# Altium PCB WhetherTimeV2.PcbDoc
Units mil, origin at the board's own origin, x right, y up, seen from the top; angles counter-clockwise.
Board outline 965 x 980 mil, 2 copper layers (Top Layer, Bottom Layer); 18 components, 11 nets, 66 pads, 19 vias.
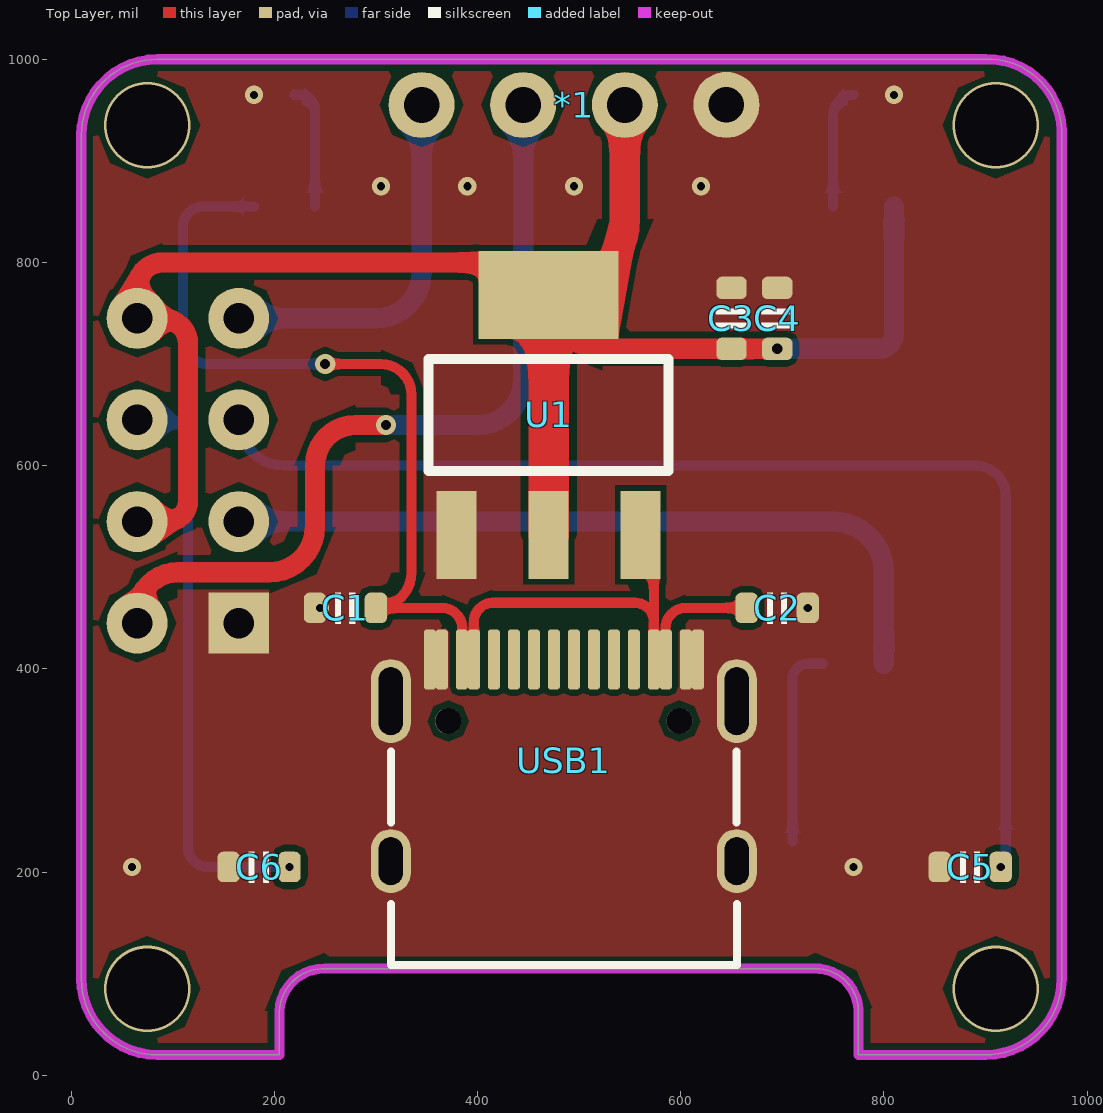
[diagram p0: Top Layer view]
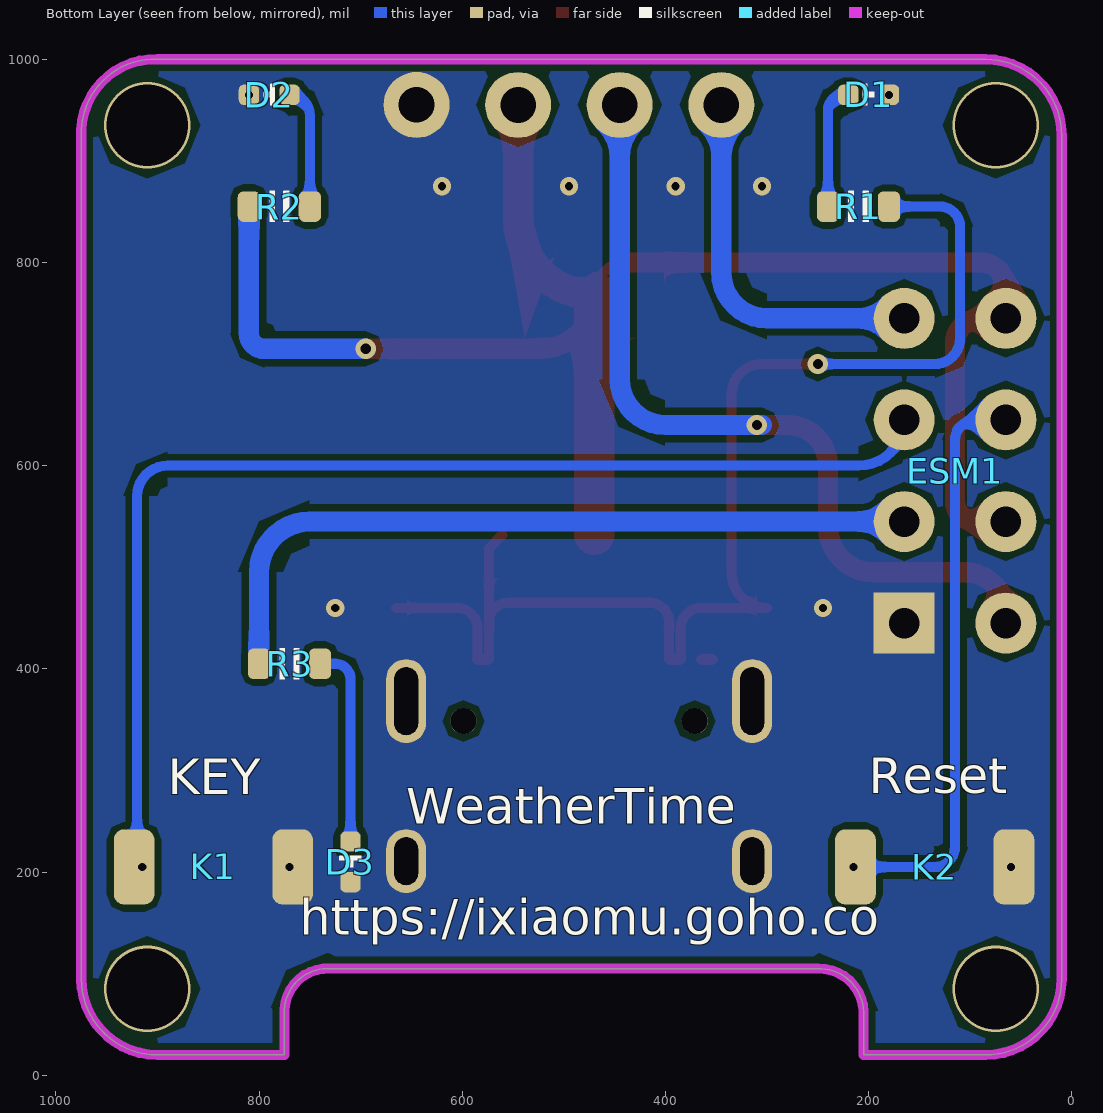
[diagram p1: Bottom Layer view, seen from below]
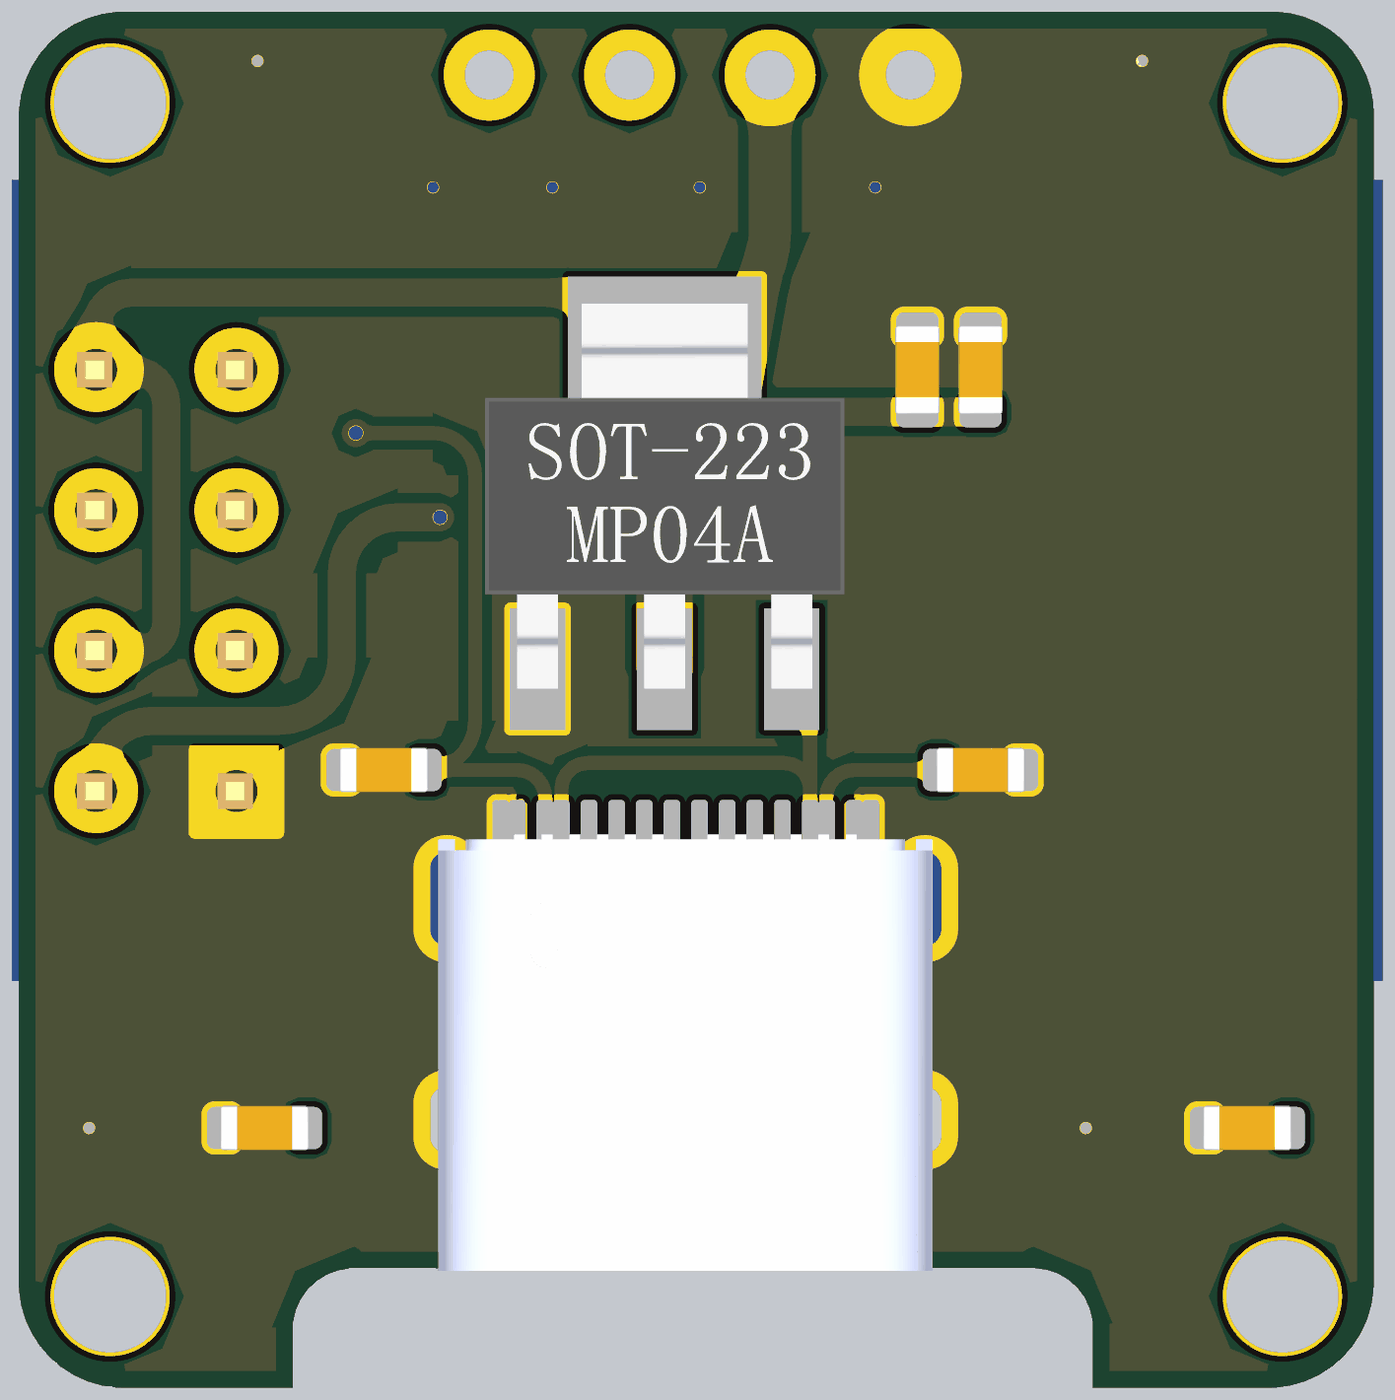
[diagram p2: 3D render of the assembled board from above, using the file's embedded part models]
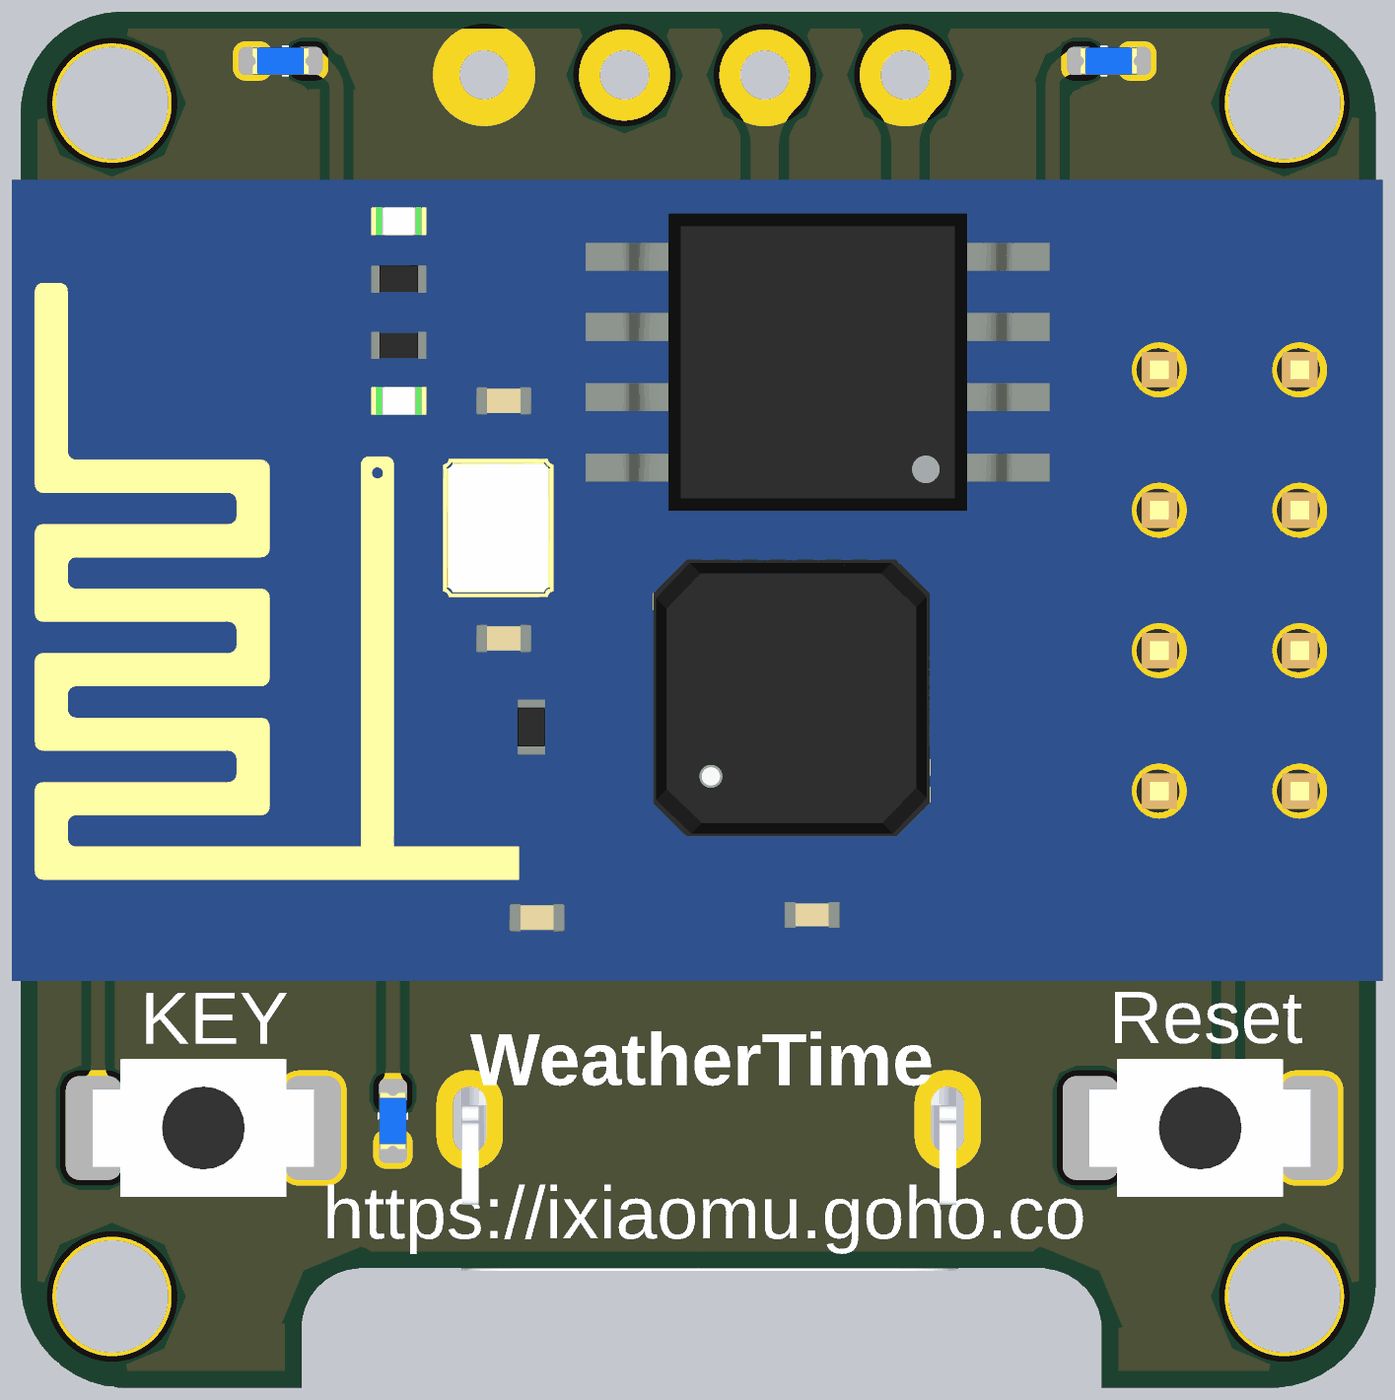
[diagram p3: 3D render of the assembled board from below, using the file's embedded part models]

## Layer stack, top to bottom
Top Solder: solder mask 0.4, Solder Resist, Dk 3.5
Top Layer: signal copper 1.4
Dielectric 1: dielectric 12.6, FR-4, Dk 4.8
Bottom Layer: signal copper 1.4
Bottom Solder: solder mask 0.4, Solder Resist, Dk 3.5

## Board outline
85,20 cw(c85,95) 10,95 10,925 cw(c85,925) 85,1000 900,1000 cw(c902.5,927.5) 975,930 975,95 cw(c900,95) 900,20 775,20 775,65 ccw(c732.5,62.5) 730,105 250,105 ccw(c248.75,61.25) 205,62.5 205,20

## Design rules (kind name [scope] priority, off if disabled: settings)
Clearance [All] p1: gap=6 ignorepadtopadclearanceinfootprint=FALSE
PolygonConnect [All] p1: connectstyle=Direct reliefconductorwidth=10 reliefentries=4 polygonreliefangle="90 Angle" airgapwidth=10
RoutingVias [All] p1: holewidth=28 width=50 viastyle="Through Hole" minholewidth=28 minwidth=50 maxholewidth=28 maxwidth=50
SolderMaskExpansion [All] p1: expansion=4 istentingtop=FALSE
Width [All] p1: maxlimit=50 minlimit=4 preferedwidth=10
30 further rules are at their usual default settings.

## Components (designator, comment, footprint, x,y, rotation, side; value= is the part's Value field where it differs from the comment)
*1 "0.96OLED" 0.96OLED_4P 494.99,955.06 r0 top
C1 "10uF" 0603-CAP 270,460 r0 top value=0.1u
C2 "0.1uF" 0603-CAP 695,460 r180 top value=0.1u
C3 "10uF" 0603-CAP 650,745 r270 top value=0.1u
C4 "0.1uF" 0603-CAP 695,745 r270 top value=0.1u
C5 "10uF" 0603-CAP 885,205 r0 top value=0.1u
C6 "10uF" 0603-CAP 185,205 r0 top value=0.1u
D1 "color?" LED_0402 200,965 r180 bottom
D2 "color?" LED_0402 790,965 r0 bottom
D3 "color?" LED_0402 710,210 r270 bottom
ESM1 "ESP8266-01S" ESP8266-01S 515,600 r90 bottom
K1 "TACT 2P" ButtonTACT_3x4x2_180 845,205 r180 bottom value=3x4
K2 "TACT 2P" ButtonTACT_3x4x2_180 135,205 r180 bottom value=3x4
R1 "10K" 0603-RES 210,855 r0 bottom value=22R
R2 "2K" 0603-RES 780,855 r180 bottom value=22R
R3 "2K" 0603-RES 770,405 r180 bottom value=22R
U1 "1117-ADJ" SOT223_JX 470,650 r270 top
USB1 "Type-C" Type-C-TOP 485,310 r270 top

## Footprints (in the part's own frame and the unit in brackets; to place one, negate y for a bottom-side part, rotate by r counter-clockwise, add the part's x,y. Pads: shape width x height; smd on the part's side, far side on the other; paste and mask are expansions set on the pad)
0.96OLED_4P [mm]
  round 1.65 hole 0.89: 1(3.81,0.001) 2(1.27,-0.002) 3(-1.27,-0.002) 4(-3.81,-0.002)
  body extent -13.35,-25.45 13.35,2.41, height 8.47
0603-CAP [mil]
  rrect50% 22x30 smd: 1(-30,0) 2(30,0)
  silkscreen extent -10,-15 10,15, body extent -31,-16 32,16, height 31
0603-RES [mil]
  rrect50% 22x30 smd: 1(-30,0) 2(30,0)
  silkscreen extent -10,-15 10,15, body extent -31,-16 31,16, height 18
ButtonTACT_3x4x2_180 [mil]
  rrect50% 40x74 smd: 1(-78,0) 2(78,0)
  body extent -79,-49 79,49, height 63
ESP8266-01S [mil]
  rect 60x60 hole 30: 1(-155,-350)
  round 60 hole 30: 2(-55,-350) 3(45,-350) 4(145,-350) 5(145,-450) 6(45,-450) 7(-55,-450) 8(-155,-450)
  body extent -290,-510 280,466, height 231
LED_0402 [mil]
  rrect50% 20x20 smd: 1(-20,0) 2(20,0)
  silkscreen extent -6,-10 6,10, body extent -20,-10 20,10, height 18
SOT223_JX [mm]
  rect 2.2x1 smd: 1(3,-2.3) 2(3,0) 3(3,2.3)
  rect 2.2x3.5 smd: 2(-3,0)
  silkscreen extent -1.4,-3 1.4,3, body extent -3.61,-3.25 3.35,3.25, height 1.7
Type-C-TOP [mm]
  round 0.65 hole 0.65: 0(-0.98,2.89) 0(-0.98,-2.89)
  oval 1.6x1 hole 0.6 slot 1.2 at 0 deg: 1(2.52,4.325) 2(2.52,-4.325)
  oval 2.1x1 hole 0.6 slot 1.7 at 0 deg: 3(-1.48,-4.325) 4(-1.48,4.325)
  rrect50% 1.5x0.3 smd: A1(-2.52,-3.35) A4(-2.52,-2.55) A5(-2.52,-1.25) A6(-2.52,-0.25) A7(-2.52,0.25) A8(-2.52,1.25) A9(-2.52,2.55) A12(-2.52,3.35) B1(-2.52,3.05) B4(-2.52,2.25) B5(-2.52,1.75) B6(-2.52,0.75) B7(-2.52,-0.75) B8(-2.52,-1.75) B9(-2.52,-2.25) B12(-2.52,-3.05)
  silkscreen extent -0.22,-4.33 5.12,4.33, body extent -2.64,-4.48 5.26,4.46, height 3.28

## Part data
C1 C2 C3 C4 C5 C6: library part 电容-0603, "Capacitor"
D1 D2 D3: library part LED_0603, "LED", Type=0402
K1 K2: library part ButtonTACT_3x4x2_180, "Button", Type="TACT 2P"
R1 R2 R3: library part 电阻-0603, "Resistor"
U1: library part AMS1117-ADJ, "IC"
USB1: library part USB-Type-C-TOP

## Via types
v1: diameter 18, hole 8, Top Layer to Bottom Layer, tented both sides, 12 vias
v2: diameter 85, hole 80, Top Layer to Bottom Layer, 4 vias
v3: diameter 20, hole 10, Top Layer to Bottom Layer, tented both sides, 3 vias

## Nets (pads, with @x,y where several pads share a name; then routed paths per layer and width w, separated by ;. In a path a pad name is that pad's centre, name@x,y a point inside that pad or via, vN(x,y) a via of type N, cw(c..) or ccw(c..) an arc to the next point about the centre after c; other vN are vias at no path point)
3V3: *1.2 C3.2 C4.2 ESM1.5 ESM1.7 R2.1 U1.2 | length 1750.8
  Top Layer w10: ESM1.7 ESM1.7@65,570 ; 65,775 ESM1.5 ESM1.5@90,745 ; U1.2@438.11,800 cw(c438.11,768.11) U1.2@470,768.11 ; 465,595 ccw(c465,600) 470,600
  Top Layer w20: ESM1.7 95,545 ccw(c95,565) 115,565 115,720 ccw(c90,720) ESM1.5@90,745 ; 65,775 cw(c90,775) 90,800 U1.2@438.11,800 ; U1.2@470,768.11 ccw(c523.11,768.11) 523.11,715 C3.2 v3(695,715)
  Top Layer w30: U1.2@470,768.11 ccw(c470,843.11) 545,843.11 *1.2
  Top Layer w40: U1.2@470,531.9 470,595 470,600 U1.2@470,768.11
  Bottom Layer w20: v3(695,715) 795,715 ccw(c795,730) 810,730 R2.1
GND: *1.1 C1.1 C2.1 C3.1 C4.1 C5.1 C6.1 D1.2 D2.2 D3.2 ESM1.1 K1.2 K2.2 U1.1 USB1.1 USB1.2 USB1.3 USB1.4 USB1.A1 USB1.A12 USB1.B1 USB1.B12 | length 11.9
  Top Layer w10: USB1.A1 USB1.B12 USB1.B12@365,409.29
  other v1: 60,205 770,205 245,460 725,460 305,875 390,875 495,875 620,875 180,965 810,965
GPIO0: C5.2 ESM1.3 K1.1 | length 1165.7
  Bottom Layer w10: ESM1.3 ccw(c210,645) 210,600 890,600 cw(c890,570) 920,570 920,210 cw(c915,210) v1(915,205)
GPIO2: ESM1.2 R3.1 | length 753.5
  Bottom Layer w20: ESM1.2 750,545 cw(c750,495) 800,495 R3.1
NetD1_1: D1.1 R1.2 | length 123.6
  Bottom Layer w10: D1.1 225,965 cw(c225,950) 240,950 R1.2
NetD2_1: D2.1 R2.2 | length 121.4
  Bottom Layer w10: R2.2 750,945 cw(c770,945) D2.1
NetD3_1: D3.1 R3.2 | length 198.6
  Bottom Layer w10: D3.1 710,390 cw(c725,390) 725,405 R3.2
RST: C6.2 ESM1.6 K2.1 | length 572.8
  Bottom Layer w10: ESM1.6 95,645 cw(c95,625) 115,625 115,225 ccw(c135,225) 135,205 K2.1 v1(215,205)
SCL: *1.3 ESM1.8 | length 822
  Top Layer w20: ESM1.8 65,455 cw(c105,455) 105,495 195,495 ccw(c195,540) 240,540 240,600 cw(c280,600) 280,640 v3(310,640)
  Bottom Layer w20: v3@305,640 v3(310,640) 400,640 ccw(c400,685) 445,685 *1.3
SDA: *1.4 ESM1.4 | length 370.7
  Bottom Layer w20: ESM1.4 300,745 ccw(c300,790) 345,790 *1.4
VDD_USB_5V: C1.2 C2.2 R1.1 U1.3 USB1.A4 USB1.A9 USB1.B4 USB1.B9 | length 1314.5
  Top Layer w10: v3(250,700) 305,700 cw(c305,670) 335,670 335,495 cw(c300,495) C1.2 365,460 cw(c365,440) 385,440 USB1.A4@385,409.21 ; USB1.A4 USB1.A4@385,409.21 ; U1.3 573.58,518.85 573.58,446.42 ; USB1.A9 USB1.A9@585,409.21 ; C2.2 605,460 ccw(c605,440) 585,440 USB1.A9@585,409.21 ; USB1.A4@385,409.21 USB1.B9 396.42,446.42 cw(c415,446.42) 415,465 555,465 cw(c555,446.42) 573.58,446.42 ; 573.58,446.42 USB1.B4 USB1.A9@585,409.21
  Bottom Layer w10: R1.1 130,855 ccw(c130,835) 110,835 110,725 ccw(c135,725) 135,700 v3(250,700)
pads on no net: USB1.0 USB1.A5 USB1.A6 USB1.A7 USB1.A8 USB1.B5 USB1.B6 USB1.B7 USB1.B8
copper on no net:
  other v2: 75,85 910,85 75,935 910,935

## Polygon pours and split planes (outlines as drawn)
GND on Top Layer "GND_L01_P000" (solid, pour order 0): 85,20 cw(c85,95) 10,95 10,925 cw(c85,925) 85,1000 900,1000 cw(c902.5,927.5) 975,930 975,95 cw(c900,95) 900,20 775,20 775,65 ccw(c732.5,62.5) 730,105 250,105 ccw(c248.75,61.25) 205,62.5 205,20
GND on Bottom Layer "GND_L02_P001" (solid, pour order 1): 85,20 cw(c85,95) 10,95 10,925 cw(c85,925) 85,1000 900,1000 cw(c902.5,927.5) 975,930 975,95 cw(c900,95) 900,20 775,20 775,65 ccw(c732.5,62.5) 730,105 250,105 ccw(c248.75,61.25) 205,62.5 205,20

## Keep-outs
Keep-Out Layer:
  the board outline again, w10

## Silkscreen, mask and mechanical layers (free items; w line width, h text height)
Bottom Overlay:
  text "Reset" at 200,265.61 h60
  text "KEY" at 890,265 h60
  text "WeatherTime" at 655,235.61 h60
  text "https://ixiaomu.goho.co" at 760,126.27 h60